# Altium PCB PCB1.PcbDoc
Units mil, origin at the board's own origin, x right, y up, seen from the top; angles counter-clockwise.
Board outline 1215 x 1604 mil, 2 copper layers (Top Layer, Bottom Layer); 13 components, 7 nets, 39 pads, 1 vias.
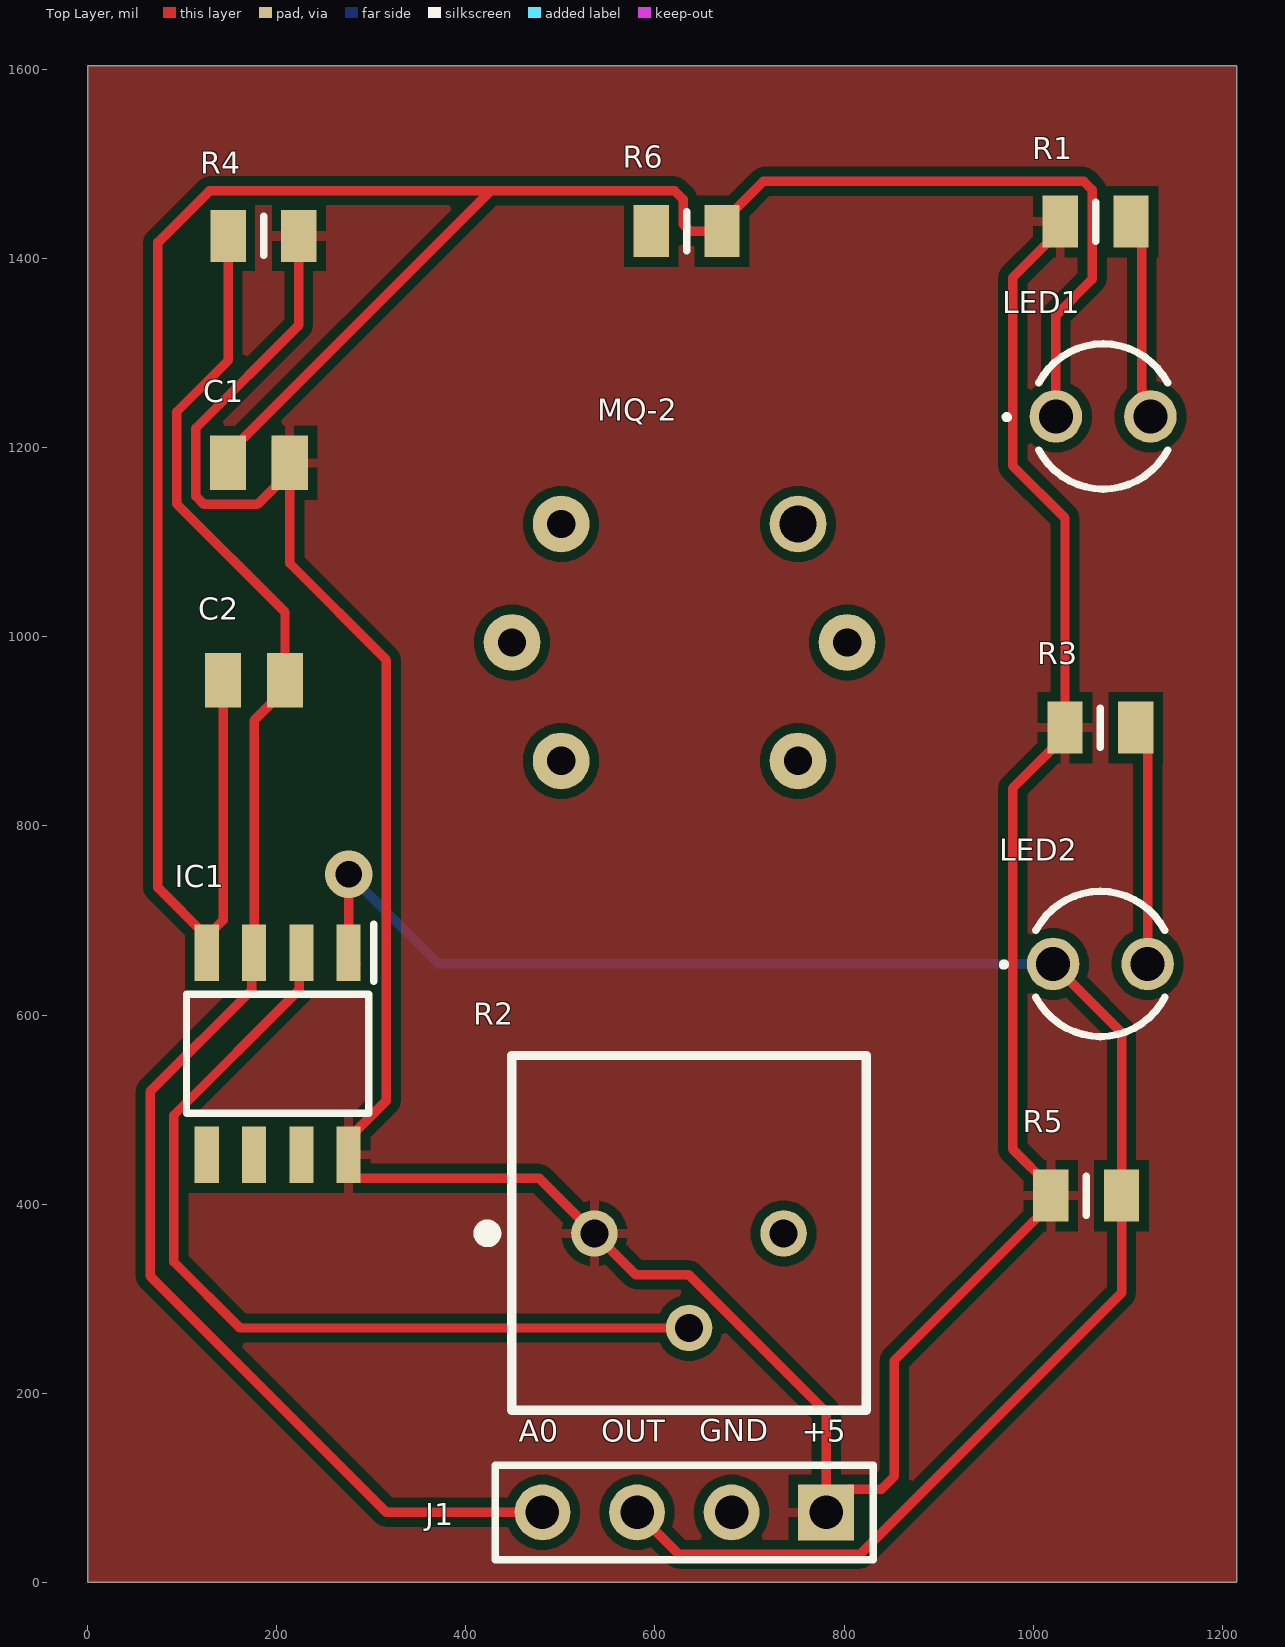
[diagram p0: Top Layer view]
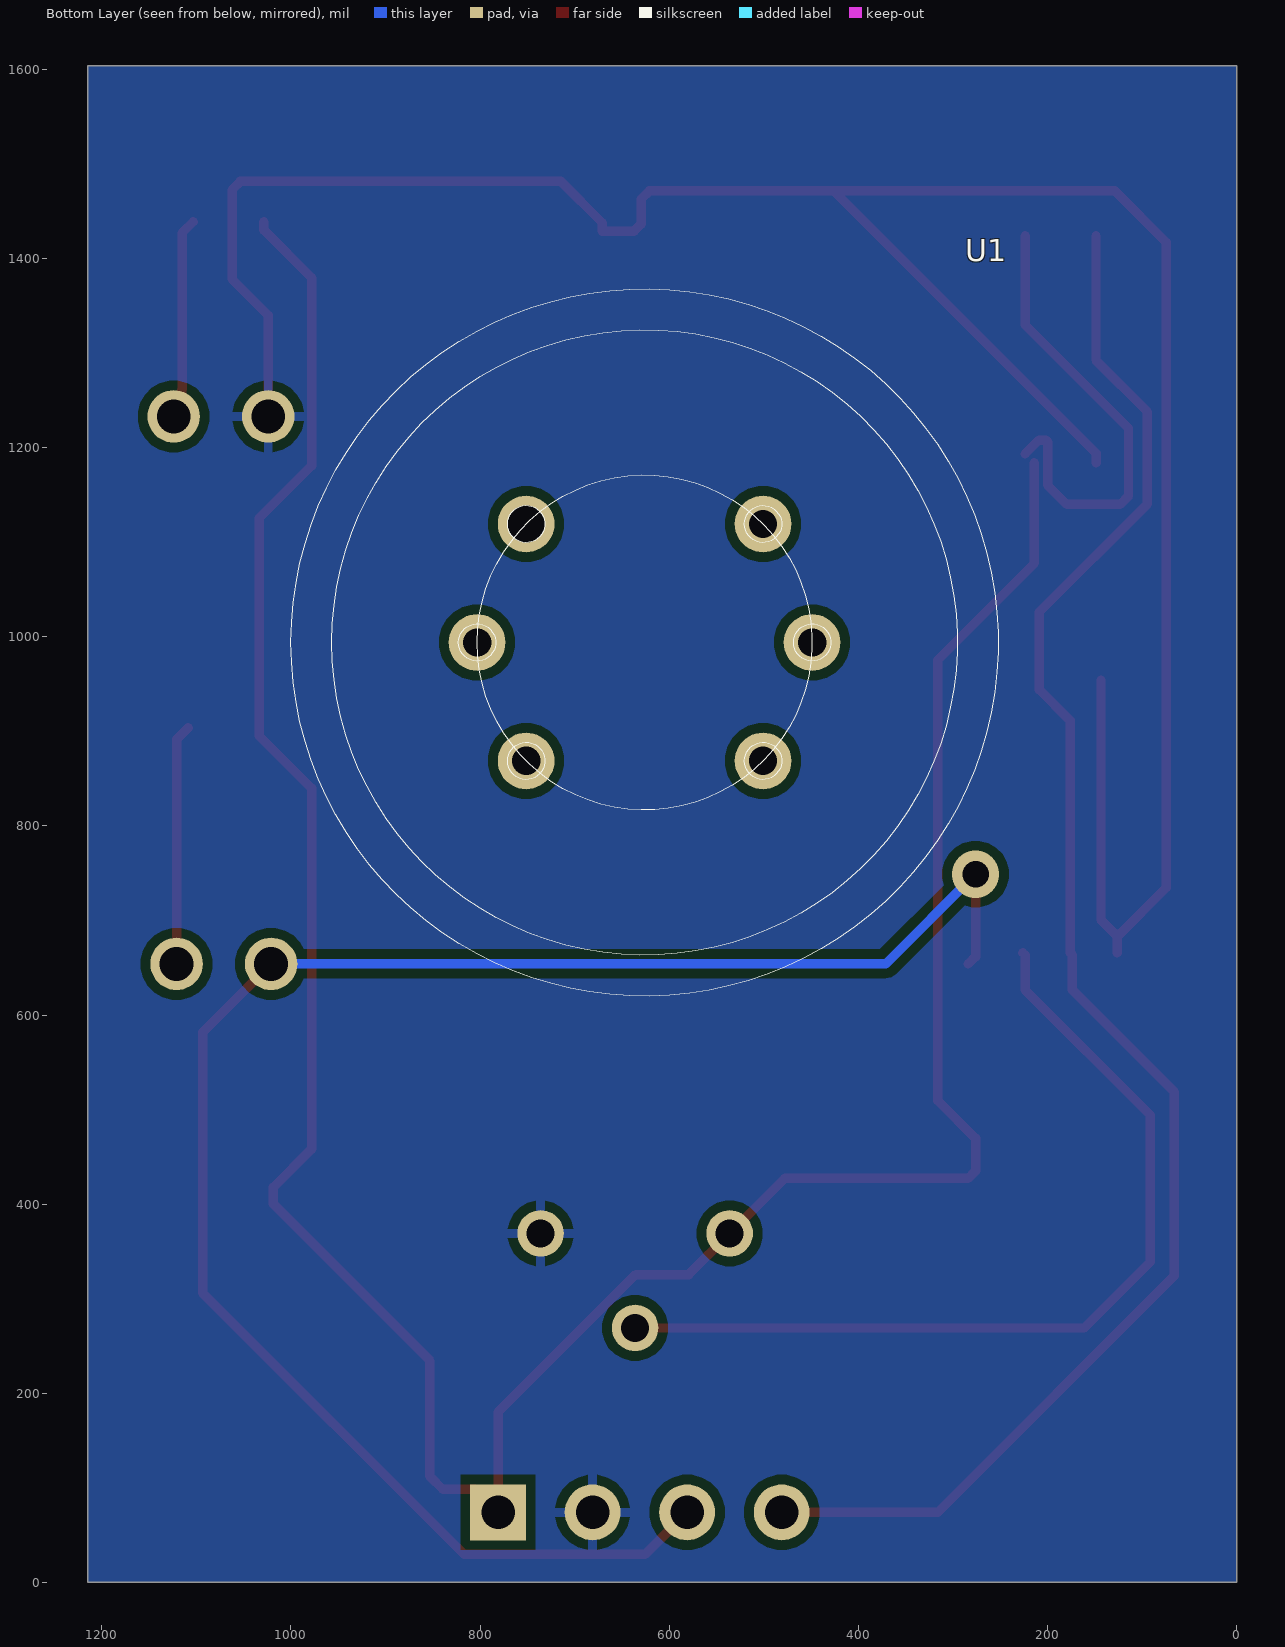
[diagram p1: Bottom Layer view, seen from below]
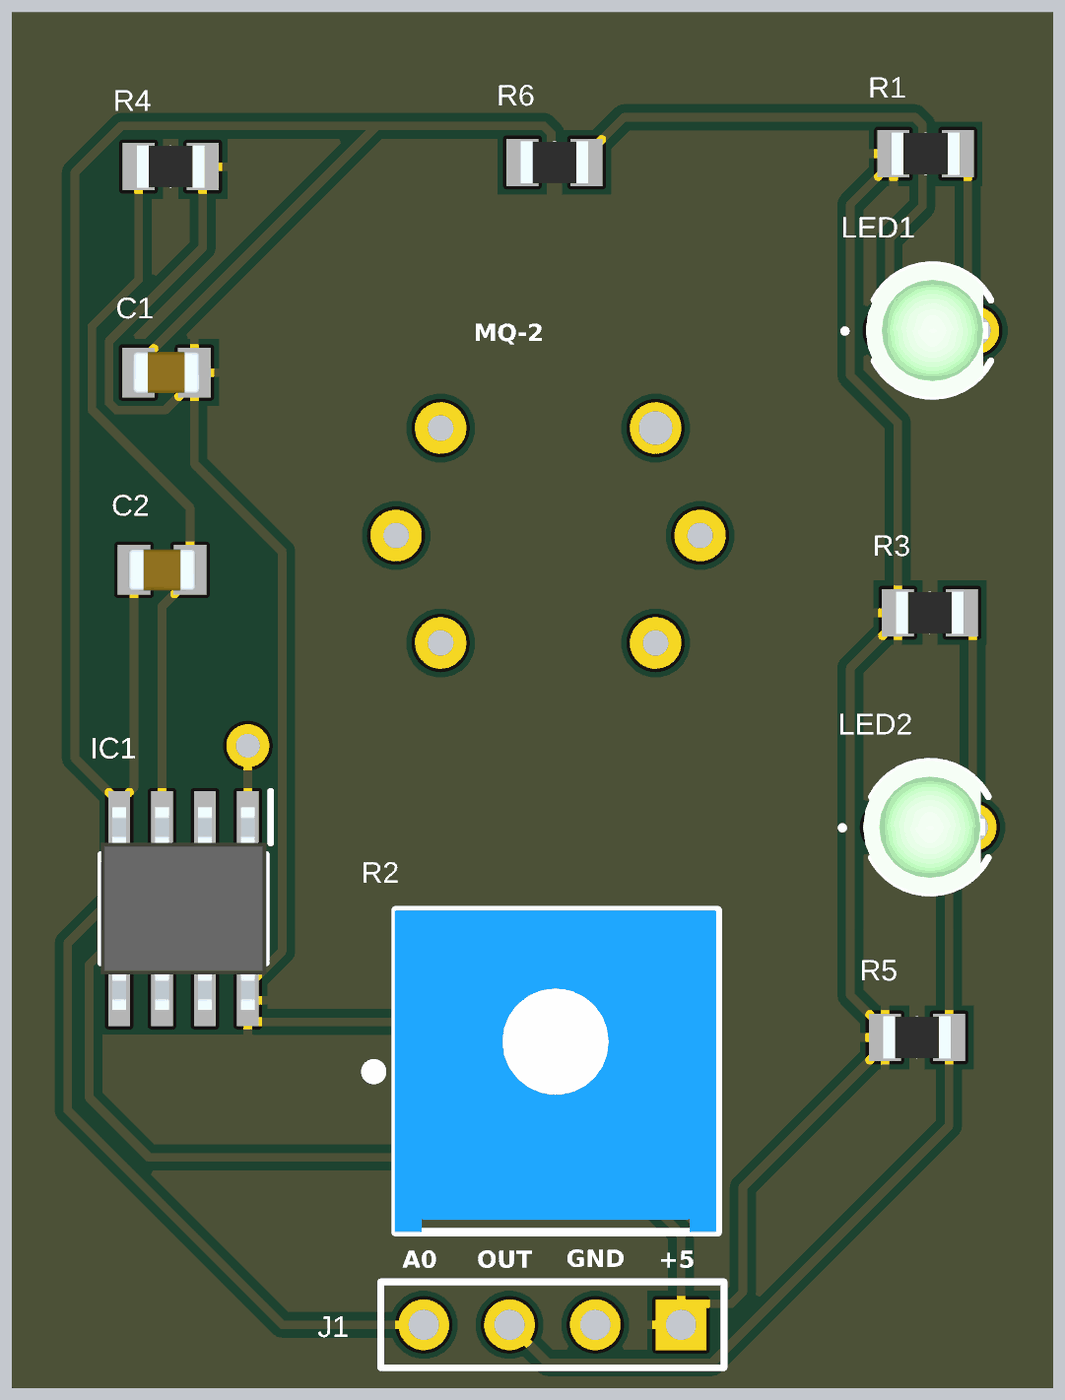
[diagram p2: 3D render of the assembled board from above, using the file's embedded part models]

## Layer stack, top to bottom
Top Solder: solder mask 0.4, Solder Resist, Dk 3.5
Top Layer: signal copper 1.4
Dielectric 1: dielectric 12.6, FR-4, Dk 4.8
Bottom Layer: signal copper 1.4
Bottom Solder: solder mask 0.4, Solder Resist, Dk 3.5

## Board outline
0,0 1215,0 1215,1604 0,1604

## Design rules (kind name [scope] priority, off if disabled: settings)
Clearance [All] p1: gap=10 ignorepadtopadclearanceinfootprint=FALSE except(0: Arc-Hole Track-Hole SMDPad-Hole THPad-Hole Via-Hole Fill-Hole Poly-Hole Region-Hole Text-Hole)
HoleSize [All] p1: absolutevalues=TRUE maxlimit=9 minlimit=1 maxpercent=80.000 minpercent=20.000
PolygonConnect [All] p1: connectstyle=Relief reliefconductorwidth=10 reliefentries=4 polygonreliefangle="90 Angle" airgapwidth=10
RoutingVias [All] p1: holewidth=28 width=50 viastyle="Through Hole" minholewidth=28 minwidth=50 maxholewidth=28 maxwidth=50
SilkToSolderMaskClearance [IsPad] p1: minsilkscreentomaskgap=8.1 clearancetoexposedcopper=TRUE
SolderMaskExpansion [All] p1: expansion=4 istentingtop=FALSE
Width [All] p1: maxlimit=10 minlimit=10 preferedwidth=10
28 further rules are at their usual default settings.

## Classes and differential pairs
component class Sheet1: C1 C2 IC1 J1 LED1 LED2 R1 R2 R3 R4 R5 R6

## Components (designator, comment, footprint, x,y, rotation, side; value= is the part's Value field where it differs from the comment)
C1 "1uf" CAPC2012X145N 181,1184 r0 top
C2 "1uf" CAPC2012X145N 176,954 r0 top
IC1 "LM393DG" SOIC127P600X175-8N 201,559 r270 top
J1 "Header 4" HDR1X4 781,74 r180 top
LED1 "151031VS06000" 151034GS03000 1074,1233 r0 top
LED2 "151031VS06000" 151034GS03000 1071,654 r0 top
R1 "1k" RESC2012X60N 1066,1439 r0 top
R2 "50k" 3386P_1 823.6,557.19 r180 top
R3 "1k" RESC2012X60N 1071,904 r0 top
R4 "1k" RESC2012X60N 186,1424 r0 top
R5 "1k" RESC2012X60N 1056,409 r180 top
R6 "1k" RESC2012X60N 633.4,1429 r180 top
U1 "MQ-2 GAS SENSOR" configuration 626,994 r180 bottom

## Footprints (in the part's own frame and the unit in brackets; to place one, negate y for a bottom-side part, rotate by r counter-clockwise, add the part's x,y. Pads: shape width x height; smd on the part's side, far side on the other; paste and mask are expansions set on the pad)
3386P_1 [mm]
  round 1.25 hole 0.75: 1(7.305,4.78) 2(4.765,7.32) 3(2.225,4.78)
  silkscreen extent 0,0 10.35,9.53, body extent 0.04,0 9.56,9.53, height 4.76
151034GS03000 [mm]
  round 1.41 hole 0.91: 1(-1.27,0) 2(1.27,0)
  silkscreen extent -2.63,-1.95 1.73,1.95, body extent -1.96,-1.97 1.65,1.98, height 11.02
CAPC2012X145N [mm]
  rect 0.97x1.47 smd: 1(-0.83,0) 2(0.83,0)
  body extent -1,-0.63 1,0.63, height 1.35
configuration [mil]
  round 60 hole 30: A(-125.27,-125.27) B(125.27,-125.27) B(125.27,125.27) H(-177.17,0) H(177.17,0)
  round 60 hole 39.37: A(-125.27,125.27)
  silkscreen extent -374,-374 374,374
HDR1X4 [mm] "Connector; Header; 4 Position"
  rect 1.5x1.5 hole 0.9: 1(0,0)
  round 1.5 hole 0.9: 2(2.54,0) 3(5.08,0) 4(7.62,0)
  silkscreen extent -1.27,-1.27 8.89,1.27
RESC2012X60N [mm]
  rect 0.95x1.4 smd: 1(-0.95,0) 2(0.95,0)
  silkscreen extent 0,-0.53 0,0.53, body extent -1,-0.63 1,0.63, height 0.6
SOIC127P600X175-8N [mm]
  rect 1.525x0.65 smd: 1(-2.712,1.905) 2(-2.712,0.635) 3(-2.712,-0.635) 4(-2.712,-1.905) 5(2.712,-1.905) 6(2.712,-0.635) 7(2.712,0.635) 8(2.712,1.905)
  silkscreen extent -3.47,-2.45 1.6,2.58, body extent -3,-2.45 3,2.45, height 1.75

## Part data
C1 C2: library part GRM21BR71H105KA12L, "Capacitor", Manufacturer_Name="Murata Electronics", Mouser Part Number=81-GRM21BR71H105KA2L, Arrow Part Number=GRM21BR71H105KA12L, Arrow Price/Stock=https://www.arrow.com/en/products/grm21br71h105ka12l/murata-manufacturing?region=europe, Datasheet Link=http://www.murata.com/~/media/webrenewal/support/library/catalog/products/capacitor/mlcc/c02e.pdf, Height=1.45mm, Manufacturer_Part_Number=GRM21BR71H105KA12L, Mouser Price/Stock=https://www.mouser.co.uk/ProductDetail/Murata-Electronics/GRM21BR71H105KA12L?qs=Er06SXQpt%252B60EIT%2FJ7%2F41Q%3D%3D
IC1: "Integrated Circuit", Manufacturer_Name=onsemi, Mouser Part Number=863-LM393DG, Arrow Part Number=LM393DG, Arrow Price/Stock=https://www.arrow.com/en/products/lm393dg/on-semiconductor?region=nac, Datasheet Link=https://www.onsemi.com/pub/Collateral/LM393-D.PDF, Height=1.75mm, Manufacturer_Part_Number=LM393DG, Mouser Price/Stock=https://www.mouser.co.uk/ProductDetail/onsemi/LM393DG?qs=2OtswVQKCOHzXsheSqC0ow%3D%3D
J1: "Header, 4-Pin", LatestRevisionDate=17-Jul-2002, LatestRevisionNote="Re-released for DXP Platform.", Publisher="Altium Limited"
LED1 LED2: "LED", Manufacturer_Name="Wurth Elektronik", Mouser Part Number=710-151031VS06000, Datasheet Link=https://katalog.we-online.de/led/datasheet/151031VS06000.pdf, Manufacturer_Part_Number=151031VS06000, Mouser Price/Stock=https://www.mouser.co.uk/ProductDetail/Wurth-Elektronik/151031VS06000?qs=LlUlMxKIyB01ggED1iKswA%3D%3D
R1 R3 R4 R5 R6: library part RC0805FR-071KL, "Resistor", Manufacturer_Name=KEMET, Mouser Part Number=603-RC0805FR-071KL, Arrow Part Number=RC0805FR-071KL, Arrow Price/Stock=https://www.arrow.com/en/products/rc0805fr-071kl/yageo?region=nac, Datasheet Link=http://www.yageo.com/documents/recent/PYu-RC_Group_51_RoHS_L_10.pdf, Height=0.6mm, Manufacturer_Part_Number=RC0805FR-071KL, Mouser Price/Stock=https://www.mouser.co.uk/ProductDetail/YAGEO/RC0805FR-071KL?qs=1ogmaHw32WJjeGY0DHXakQ%3D%3D
R2: library part 3386P-1-104LF, "Variable Resistor", Manufacturer_Name=Bourns, Mouser Part Number=652-3386P-1-104LF, Arrow Part Number=3386P-1-104LF, Arrow Price/Stock=https://www.arrow.com/en/products/3386p-1-104lf/bourns?region=nac, Datasheet Link=https://componentsearchengine.com/Datasheets/2/3386P-1-104LF.pdf, Manufacturer_Part_Number=3386P-1-104LF, Mouser Price/Stock=https://www.mouser.co.uk/ProductDetail/Bourns/3386P-1-104LF?qs=m2uG%2FFdTAPVt57WUqvIChw%3D%3D
U1: library part MQ-2, "FEATURES /  Wide detecting scope Fast response and High sensitivity /  Stable and long life Simple drive circuit", ComponentLink1Description="data sheet", ComponentLink1URL=https://www.mouser.com/datasheet/2/321/605-00008-MQ-2-Datasheet-370464.pdf

## Via types
v1: diameter 50, hole 28, Top Layer to Bottom Layer, 1 vias

## Nets (pads, with @x,y where several pads share a name; then routed paths per layer and width w, separated by ;. In a path a pad name is that pad's centre, name@x,y a point inside that pad or via, vN(x,y) a via of type N, cw(c..) or ccw(c..) an arc to the next point about the centre after c; other vN are vias at no path point)
+5: C1.2 IC1.8 J1.1 R1.1 R2.1 R3.1 R4.2 R5.2 | length 3585.6
  Top Layer w10: C1.2 213.68,1077.69 316,975.36 316,509.45 276,469.45 IC1.8 276,435 283.8,427.21 477.79,427.21 R2.1 579.5,325.5 635.51,325.5 781,180.01 J1.1 805.53,98.53 839.53,98.53 853,112 853,234.54 1018.6,400.14 R5.2 1018.6,417.86 978.24,458.21 978.24,839.79 1033.6,895.14 R3.1 1033.6,1125.5 978.24,1180.85 978.24,1379.79 1028.6,1430.14 R1.1 ; C1.2@223.4,1193.72 209.19,1207.94 201.22,1207.94 199.58,1206.3 199.58,1160.06 179.58,1140.06 123.02,1140.06 114.23,1148.85 114.23,1220.56 223.4,1329.73 R4.2
A0: C2.2 IC1.3 J1.4 R4.1 | length 1747.6
  Top Layer w10: R4.1 148.6,1292.33 94.23,1237.96 94.23,1140.57 208.68,1026.12 C2.2 208.68,944.16 176,911.48 IC1.3 173.61,663.38 173.61,626.61 66,519 66,324 316,74 J1.4
GND: C1.1 C2.1 IC1.4 J1.2 LED1.1 R2.3 R6.1 | length 2783.5
  Top Layer w10: IC1.4 IC1.4@126,683 ; C2.1 143.32,700.32 IC1.4@126,683 ; C1.1 148.32,1193.84 426.04,1471.56 ; LED1.1 1024,1339.89 1062.3,1378.19 1062.3,1472.77 1053.51,1481.56 714.5,1481.56 670.8,1437.86 R6.1 637.1,1429 629.7,1436.4 629.7,1462.77 620.91,1471.56 426.04,1471.56 ; IC1.4@126,683 74.23,734.77 74.23,1417.1 128.68,1471.56 426.04,1471.56
NetIC1_2: IC1.2 R2.2 | length 956.7
  Top Layer w10: IC1.2 223.61,663.38 223.61,626.61 91,494 91,339 161,269 R2.2
NetLED1_2: LED1.2 R1.2 | length 214.5
  Top Layer w10: R1.2 1115,1427.4 1115,1261.61 1115.29,1261.32 1115.29,1241.71 LED1.2
NetLED2_2: LED2.2 R3.2 | length 255.2
  Top Layer w10: R3.2 1121,891.4 LED2.2
OUT: IC1.1 J1.3 LED2.1 R5.1 | length 1905.9
  Top Layer w10: v1(276,749) IC1.1 276,661.8 IC1.1@283.8,654 ; J1.3 625.53,29.47 816.74,29.47 1093.4,306.13 R5.1 1093.4,581.6 LED2.1
  Bottom Layer w10: v1(276,749) 371,654 LED2.1
pads on no net: IC1.5 IC1.6 IC1.7 R6.2 U1.A U1.B U1.H

## Polygon pours and split planes (outlines as drawn)
GND on Bottom Layer "NONET_L-01_P-001" (solid, remove dead copper, pour order 1): 0,0 1215,0 1215,1604 0,1604
+5 on Top Layer "NONET_L-01_P-001" (solid, remove dead copper, pour order 2): -1,0 1215,0 1215,1603 1214,1604 0,1604 0,1 -17,18 -17,72

## Silkscreen, mask and mechanical layers (free items; w line width, h text height)
Top Overlay:
  text "MQ-2" at 539,1220.73 h39.37
  text "GND" at 647,141.51 h39.37
  text "A0" at 456,140.51 h39.37
  text "OUT" at 543,140.51 h39.37
  text "+5" at 755,140.51 h39.37